# Altium PCB 8ch_RGB_Controller.PcbDoc (part 2 of 2)
Units mm, origin at the board's own origin, x right, y up, seen from the top; angles counter-clockwise.
Board outline 60 x 60 mm, 2 copper layers (Top Layer, Bottom Layer), stack 0.781 mm thick; 107 components, 106 nets, 314 pads, 0 vias.
Unrouted connection lines stored in the file: 228.
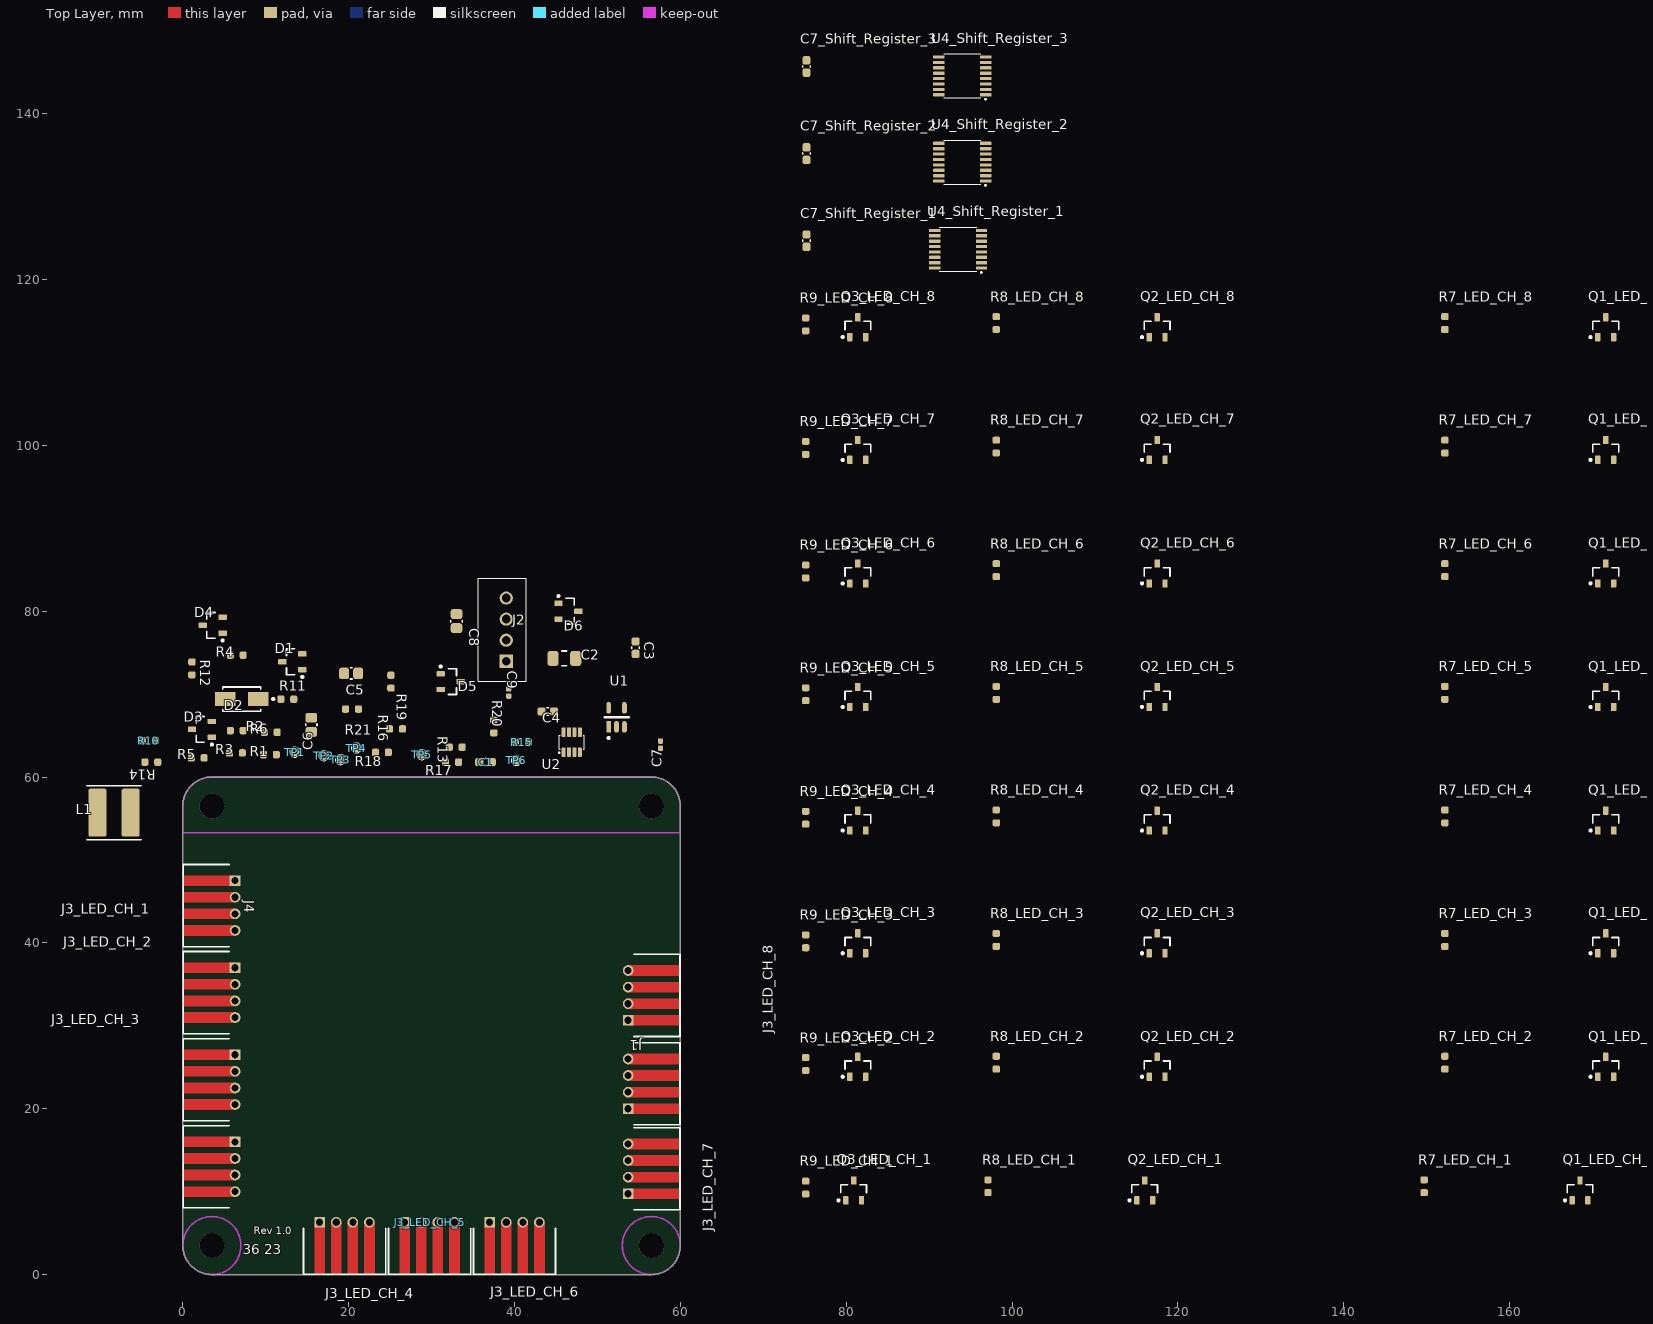
[diagram p0: Top Layer view]

## Silkscreen, mask and mechanical layers (free items; w line width, h text height) (continued)
Bottom Solder: (continued)
  region: 53,56.5 ccw(c56.5,56.5) 56.5,53 ccw(c56.5,56.5) 60,56.5 ccw(c56.5,56.5) 56.5,60 ccw(c56.5,56.5)
  region: 53,3.5 ccw(c56.5,3.5) 56.5,0 ccw(c56.5,3.5) 60,3.5 ccw(c56.5,3.5) 56.5,7 ccw(c56.5,3.5)
  region: 0,3.5 ccw(c3.5,3.5) 3.5,0 ccw(c3.5,3.5) 7,3.5 ccw(c3.5,3.5) 3.5,7 ccw(c3.5,3.5)
Mechanical 1:
  lines w0.2: 0,3.5 ccw(c3.5,3.5) 3.5,0 56.5,0 ccw(c56.5,3.5) 60,3.5 60,56.5 ccw(c56.5,56.5) 56.5,60 3.5,59.999 ccw(c3.5,56.5) 0,56.5 ; 0.001,3.5 0.001,56.5